# EAGLE board untitled (EAGLE 9.6.2)
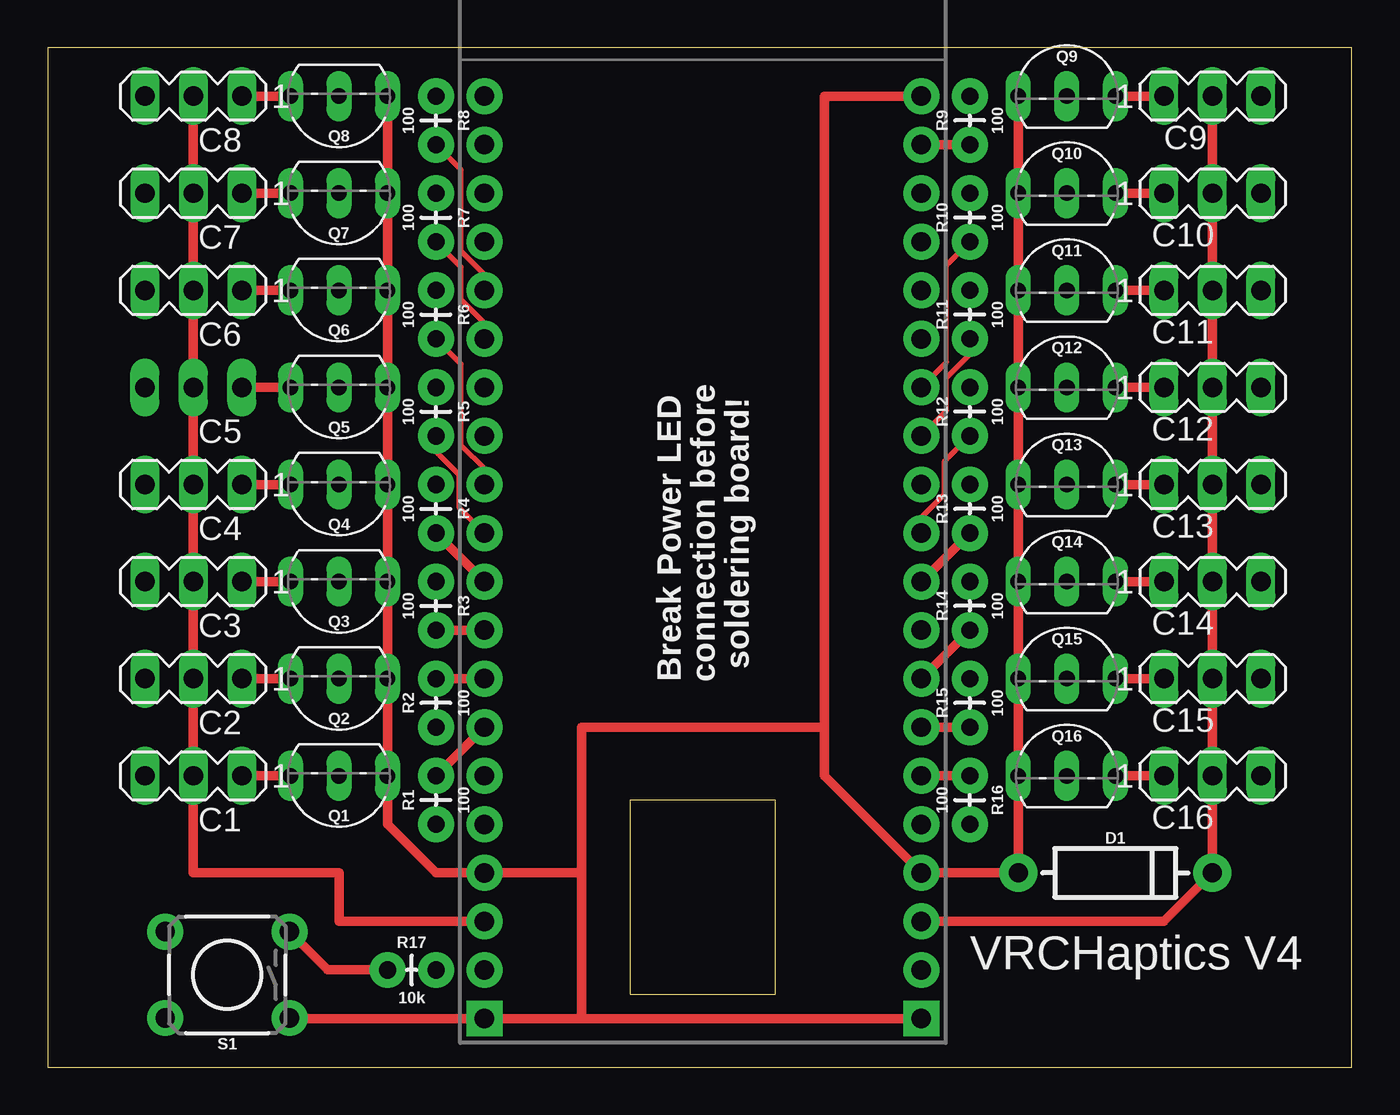
[diagram p0: board, top side]
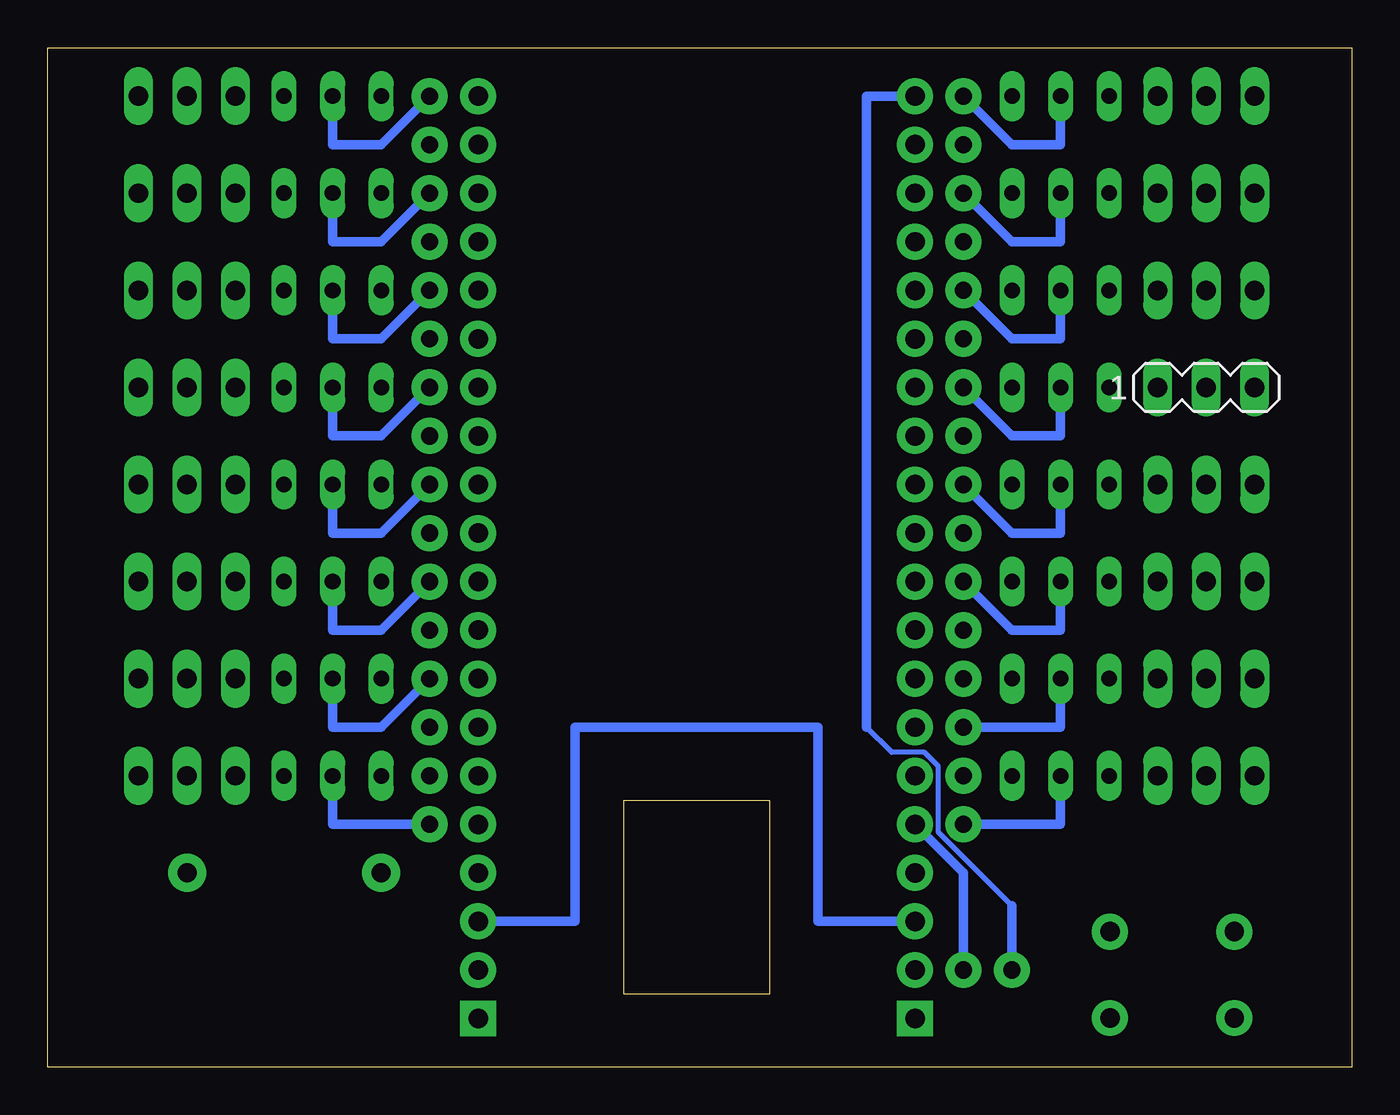
[diagram p1: board, bottom side, seen from below]

Size 68.25 x 53.33 mm. Coordinates in mm from the lower left corner, seen from the top.
Outline: 0,0 68.25,0 68.25,53.33 0,53.33 0,0
Copper layers (1*16): Top 0.035mm / dielectric 1.5mm / Bottom 0.035mm
Design rules "default": minimum track width 6mil, minimum drill 0.35mm, track to track 6mil, track to pad 6mil, pad to pad 6mil, via to via 6mil, smd to smd 6mil, copper to edge 40mil, drill to drill 6mil, minimum pad ring 10mil, minimum via ring 8mil, stop-mask expansion 4mil, vias tented up to drill 0mil, thermal gap 10mil
Milling: area 30.5,3.8 to 38.1,14

## Footprints (pad centres in the part's own frame; a part is rotated, then mirrored left to right if it is on the bottom)
ESP32_THING = drill 1.016 pad 1.88 square: 1 1.27,1.27; 40 24.13,1.27 | drill 1.016 pad 1.88: 2 1.27,3.81; 3 1.27,6.35; 4 1.27,8.89; 5 1.27,11.43; 6 1.27,13.97; 7 1.27,16.51; 8 1.27,19.05; 9 1.27,21.59; 10 1.27,24.13; 11 1.27,26.67; 12 1.27,29.21; 13 1.27,31.75; 14 1.27,34.29; 15 1.27,36.83; 16 1.27,39.37; 17 1.27,41.91; 18 1.27,44.45; 19 1.27,46.99; 20 1.27,49.53; 21 24.13,49.53; 22 24.13,46.99; 23 24.13,44.45; 24 24.13,41.91; 25 24.13,39.37; 26 24.13,36.83; 27 24.13,34.29; 28 24.13,31.75; 29 24.13,29.21; 30 24.13,26.67; 31 24.13,24.13; 32 24.13,21.59; 33 24.13,19.05; 34 24.13,16.51; 35 24.13,13.97; 36 24.13,11.43; 37 24.13,8.89; 38 24.13,6.35; 39 24.13,3.81
MA03-1 = drill 1.016 long: 1 -2.54,0; 2 0,0; 3 2.54,0
DIODE-1N4001 = drill 1 pad 1.981: A -5.08,0; C 5.08,0
TO92-EBC = drill 0.813 long: B 0,-1.27; C 2.54,-1.27; E -2.54,-1.27
AXIAL-0.1 = drill 0.9 pad 1.88: P$1 -1.27,0; P$2 1.27,0
TACTILE_SWITCH_PTH_6.0MM = drill 1.016 pad 1.88: 1 -3.251,2.261; 2 3.251,2.261; 3 -3.251,-2.261; 4 3.251,-2.261

## Placement (x,y rotation side)
B1  ESP32_THING_W_ANT_KEEPOUT  [ESP32_THING]  21.59,1.27 0 top
C1  [MA03-1]  7.62,15.24 180 top
C2  [MA03-1]  7.62,20.32 180 top
C3  [MA03-1]  7.62,25.4 180 top
C4  [MA03-1]  7.62,30.48 180 top
C5  [MA03-1]  7.62,35.56 0 bottom
C6  [MA03-1]  7.62,40.64 180 top
C7  [MA03-1]  7.62,45.72 180 top
C8  [MA03-1]  7.62,50.8 180 top
C9  [MA03-1]  60.96,50.8 0 top
C10  [MA03-1]  60.96,45.72 0 top
C11  [MA03-1]  60.96,40.64 0 top
C12  [MA03-1]  60.96,35.56 0 top
C13  [MA03-1]  60.96,30.48 0 top
C14  [MA03-1]  60.96,25.4 0 top
C15  [MA03-1]  60.96,20.32 0 top
C16  [MA03-1]  60.96,15.24 0 top
D1  1A/50V/1.1V  [DIODE-1N4001]  55.88,10.16 0 top
Q1  600mA/40V  [TO92-EBC]  15.24,13.97 180 top
Q2  600mA/40V  [TO92-EBC]  15.24,19.05 180 top
Q3  600mA/40V  [TO92-EBC]  15.24,24.13 180 top
Q4  600mA/40V  [TO92-EBC]  15.24,29.21 180 top
Q5  600mA/40V  [TO92-EBC]  15.24,34.29 180 top
Q6  600mA/40V  [TO92-EBC]  15.24,39.37 180 top
Q7  600mA/40V  [TO92-EBC]  15.24,44.45 180 top
Q8  600mA/40V  [TO92-EBC]  15.24,49.53 180 top
Q9  600mA/40V  [TO92-EBC]  53.34,52.07 0 top
Q10  600mA/40V  [TO92-EBC]  53.34,46.99 0 top
Q11  600mA/40V  [TO92-EBC]  53.34,41.91 0 top
Q12  600mA/40V  [TO92-EBC]  53.34,36.83 0 top
Q13  600mA/40V  [TO92-EBC]  53.34,31.75 0 top
Q14  600mA/40V  [TO92-EBC]  53.34,26.67 0 top
Q15  600mA/40V  [TO92-EBC]  53.34,21.59 0 top
Q16  600mA/40V  [TO92-EBC]  53.34,16.51 0 top
R1  100  [AXIAL-0.1]  20.32,13.97 90 top
R2  100  [AXIAL-0.1]  20.32,19.05 90 top
R3  100  [AXIAL-0.1]  20.32,24.13 270 top
R4  100  [AXIAL-0.1]  20.32,29.21 270 top
R5  100  [AXIAL-0.1]  20.32,34.29 270 top
R6  100  [AXIAL-0.1]  20.32,39.37 270 top
R7  100  [AXIAL-0.1]  20.32,44.45 270 top
R8  100  [AXIAL-0.1]  20.32,49.53 270 top
R9  100  [AXIAL-0.1]  48.26,49.53 90 top
R10  100  [AXIAL-0.1]  48.26,44.45 90 top
R11  100  [AXIAL-0.1]  48.26,39.37 90 top
R12  100  [AXIAL-0.1]  48.26,34.29 90 top
R13  100  [AXIAL-0.1]  48.26,29.21 90 top
R14  100  [AXIAL-0.1]  48.26,24.13 90 top
R15  100  [AXIAL-0.1]  48.26,19.05 90 top
R16  100  [AXIAL-0.1]  48.26,13.97 270 top
R17  10k  [AXIAL-0.1]  19.05,5.08 0 top
S1  MOMENTARY-SWITCH-SPST-PTH-6.0MM  [TACTILE_SWITCH_PTH_6.0MM]  9.4,4.83 180 top

## Library data of the parts
B1 = SparkFun-Boards; SF_ID: DEV-13907
C1-C16 = con-lstb; OC_FARNELL: unknown; OC_NEWARK: unknown
D1 = SparkFun-DiscreteSemi; PROD_ID: DIO-09176
Q1-Q16 = transistor-neu-to92
R1-R16 = SparkFun-Resistors; PROD_ID: RES-12181
R17 = SparkFun-Resistors; PROD_ID: RES-09435
S1 = SparkFun-Switches; PROD_ID: SWCH-08441; SF_SKU: COM-00097

## Nets
GND: B1.1 B1.4 B1.21 B1.37 B1.40 D1.A Q1.E Q2.E Q3.E Q4.E Q5.E Q6.E Q7.E Q8.E Q9.E Q10.E Q11.E Q12.E Q13.E Q14.E Q15.E Q16.E S1.1
N$1: B1.11 R5.P$2
N$2: B1.22 R9.P$1
N$3: Q9.B R9.P$2
N$4: B1.27 R10.P$1
N$5: B1.10 R4.P$2
N$6: B1.28 R11.P$1
N$7: B1.35 R16.P$1
N$8: B1.34 R15.P$1
N$9: B1.33 R14.P$1
N$10: Q16.B R16.P$2
N$11: Q15.B R15.P$2
N$12: Q14.B R14.P$2
N$13: Q13.B R13.P$2
N$14: Q12.B R12.P$2
N$15: Q11.B R11.P$2
N$16: Q10.B R10.P$2
N$17: B1.31 R13.P$1
N$18: B1.30 R12.P$1
N$19: Q2.B R2.P$1
N$20: Q1.B R1.P$1
N$21: Q3.B R3.P$1
N$22: Q4.B R4.P$1
N$23: Q5.B R5.P$1
N$24: Q6.B R6.P$1
N$25: Q7.B R7.P$1
N$26: Q8.B R8.P$1
N$27: C8.1 Q8.C
N$28: C7.1 Q7.C
N$29: C6.1 Q6.C
N$30: C5.1 Q5.C
N$31: C4.1 Q4.C
N$32: C3.1 Q3.C
N$33: C2.1 Q2.C
N$34: C1.1 Q1.C
N$35: C16.1 Q16.C
N$36: C15.1 Q15.C
N$37: C14.1 Q14.C
N$38: C13.1 Q13.C
N$39: C12.1 Q12.C
N$40: C11.1 Q11.C
N$41: C10.1 Q10.C
N$42: C9.1 Q9.C
N$43: B1.3 B1.38 C1.2 C2.2 C3.2 C4.2 C5.2 C6.2 C7.2 C8.2 C9.2 C10.2 C11.2 C12.2 C13.2 C14.2 C15.2 C16.2 D1.C
N$44: B1.20 R17.P$1 S1.3
N$45: B1.9 R3.P$2
N$46: B1.16 R8.P$2
N$47: B1.15 R7.P$2
N$48: B1.12 R6.P$2
N$49: B1.8 R2.P$2
N$50: B1.7 R1.P$2
N$51: B1.5 R17.P$2

## Tracks (layer width: path | path; a pad name or v marks a point on that pad's centre or on a via)
GND
  Top 0.152: B1.1 27.94,2.54 B1.40 | 12.7,2.54 12.68,2.54 S1.1
  Top 0.508: 27.94,10.16 B1.4 20.32,10.16 17.78,12.7 Q1.E Q2.E Q3.E Q4.E Q5.E Q6.E Q7.E Q8.E | 40.64,17.78 27.94,17.78 27.94,10.16 | Q9.E Q10.E Q11.E Q12.E Q13.E Q14.E Q15.E Q16.E D1.A B1.37 40.64,15.24 40.64,17.78 | 27.94,10.16 27.94,2.54 | B1.40 B1.1 12.7,2.54 | B1.21 40.64,50.8 40.64,17.78
N$1
  Top 0.254: B1.11 21.54,29.26 21.54,30.98 20.32,32.2 R5.P$2
N$2
  Top 0.508: B1.22 R9.P$1
N$3
  Bottom 0.508: R9.P$2 50.8,48.26 53.34,48.26 Q9.B
N$4
  Top 0.254: B1.27 47.04,36.88 47.04,41.96 R10.P$1
N$5
  Top 0.508: B1.10 R4.P$2
N$6
  Top 0.254: B1.28 47.04,34.34 47.04,36.06 48.26,37.28 R11.P$1
N$7
  Top 0.508: B1.35 R16.P$1
N$8
  Top 0.508: B1.34 R15.P$1
N$9
  Top 0.508: B1.33 R14.P$1
N$10
  Bottom 0.508: Q16.B 53.34,12.7 R16.P$2
N$11
  Bottom 0.508: Q15.B 53.34,17.78 50.8,17.78 R15.P$2
N$12
  Bottom 0.508: Q14.B 53.34,22.86 50.8,22.86 R14.P$2
N$13
  Bottom 0.508: Q13.B 53.34,27.94 50.8,27.94 R13.P$2
N$14
  Bottom 0.508: Q12.B 53.34,33.02 50.8,33.02 R12.P$2
N$15
  Bottom 0.508: Q11.B 53.34,38.1 50.8,38.1 R11.P$2
N$16
  Bottom 0.508: Q10.B 53.34,43.18 50.8,43.18 R10.P$2
N$17
  Top 0.508: B1.31 R13.P$1
N$18
  Top 0.254: B1.30 45.72,28.76 46.94,29.98 46.94,31.7 R12.P$1
N$19
  Bottom 0.508: Q2.B 15.24,17.78 R2.P$1
N$20
  Bottom 0.508: Q1.B 15.24,12.7 R1.P$1
N$21
  Bottom 0.508: Q3.B 15.24,22.86 17.78,22.86 R3.P$1
N$22
  Bottom 0.508: R4.P$1 17.78,27.94 15.24,27.94 Q4.B
N$23
  Bottom 0.508: Q5.B 15.24,33.02 17.78,33.02 R5.P$1
N$24
  Bottom 0.508: Q6.B 15.24,38.1 17.78,38.1 R6.P$1
N$25
  Bottom 0.508: R7.P$1 17.78,43.18 15.24,43.18 Q7.B
N$26
  Bottom 0.508: R8.P$1 17.78,48.26 15.24,48.26 Q8.B
N$27
  Top 0.508: Q8.C C8.1
N$28
  Top 0.508: C7.1 Q7.C
N$29
  Top 0.508: Q6.C C6.1
N$30
  Top 0.508: C5.1 Q5.C
N$31
  Top 0.508: Q4.C C4.1
N$32
  Top 0.508: C3.1 Q3.C
N$33
  Top 0.508: Q2.C C2.1
N$34
  Top 0.508: C1.1 Q1.C
N$35
  Top 0.508: Q16.C C16.1
N$36
  Top 0.508: Q15.C C15.1
N$37
  Top 0.508: Q14.C C14.1
N$38
  Top 0.508: Q13.C C13.1
N$39
  Top 0.508: Q12.C C12.1
N$40
  Top 0.508: Q11.C C11.1
N$41
  Top 0.508: Q10.C C10.1
N$42
  Top 0.508: Q9.C C9.1
N$43
  Top 0.508: C9.2 C10.2 C11.2 C12.2 C13.2 C14.2 C15.2 C16.2 D1.C 58.42,7.62 B1.38 | B1.3 15.24,7.62 15.24,10.16 7.62,10.16 C1.2 C2.2 C3.2 C4.2 C5.2 C6.2 C7.2 C8.2
  Bottom 0.508: B1.3 27.94,7.62 27.94,17.78 40.64,17.78 40.64,7.62 B1.38
N$44
  Top 0.508: S1.3 14.66,5.08 R17.P$1
  Bottom 0.254: 25.4,17.78 24.08,16.46 22.36,16.46 21.64,15.74 21.64,12.3 17.78,8.44
  Bottom 0.508: B1.20 25.4,50.8 25.4,17.78 | R17.P$1 17.78,8.44
N$45
  Top 0.508: B1.9 R3.P$2
N$46
  Top 0.254: B1.16 22.86,41.46 21.64,42.67 21.64,46.94 R8.P$2
N$47
  Top 0.254: B1.15 22.86,38.92 21.64,40.13 21.64,41.86 R7.P$2
N$48
  Top 0.254: B1.12 22.86,31.3 21.64,32.52 21.64,36.78 R6.P$2
N$49
  Top 0.508: B1.8 R2.P$2
N$50
  Top 0.508: B1.7 R1.P$2
N$51
  Bottom 0.508: R17.P$2 20.32,10.16 B1.5

## Text on the board
tNames: Break Power LED / connection before / soldering board! | VRCHaptics V4